# Allegro board AVRUSB500_2.brd
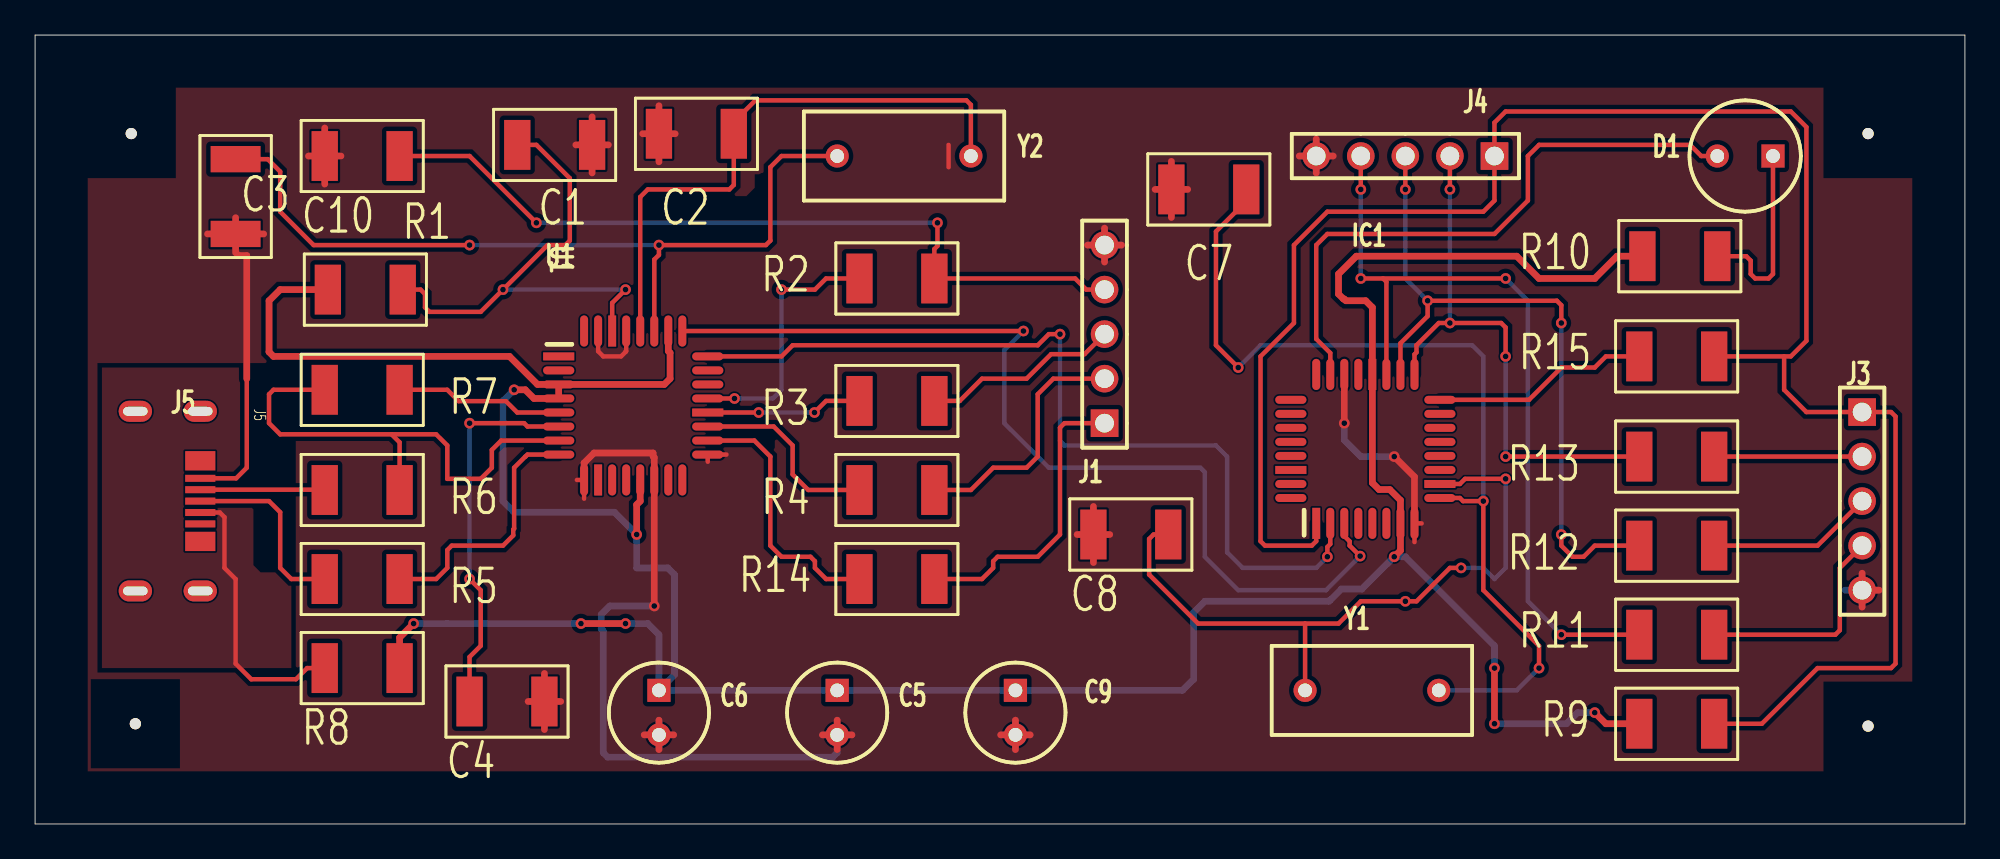
[diagram p0: board, top side]
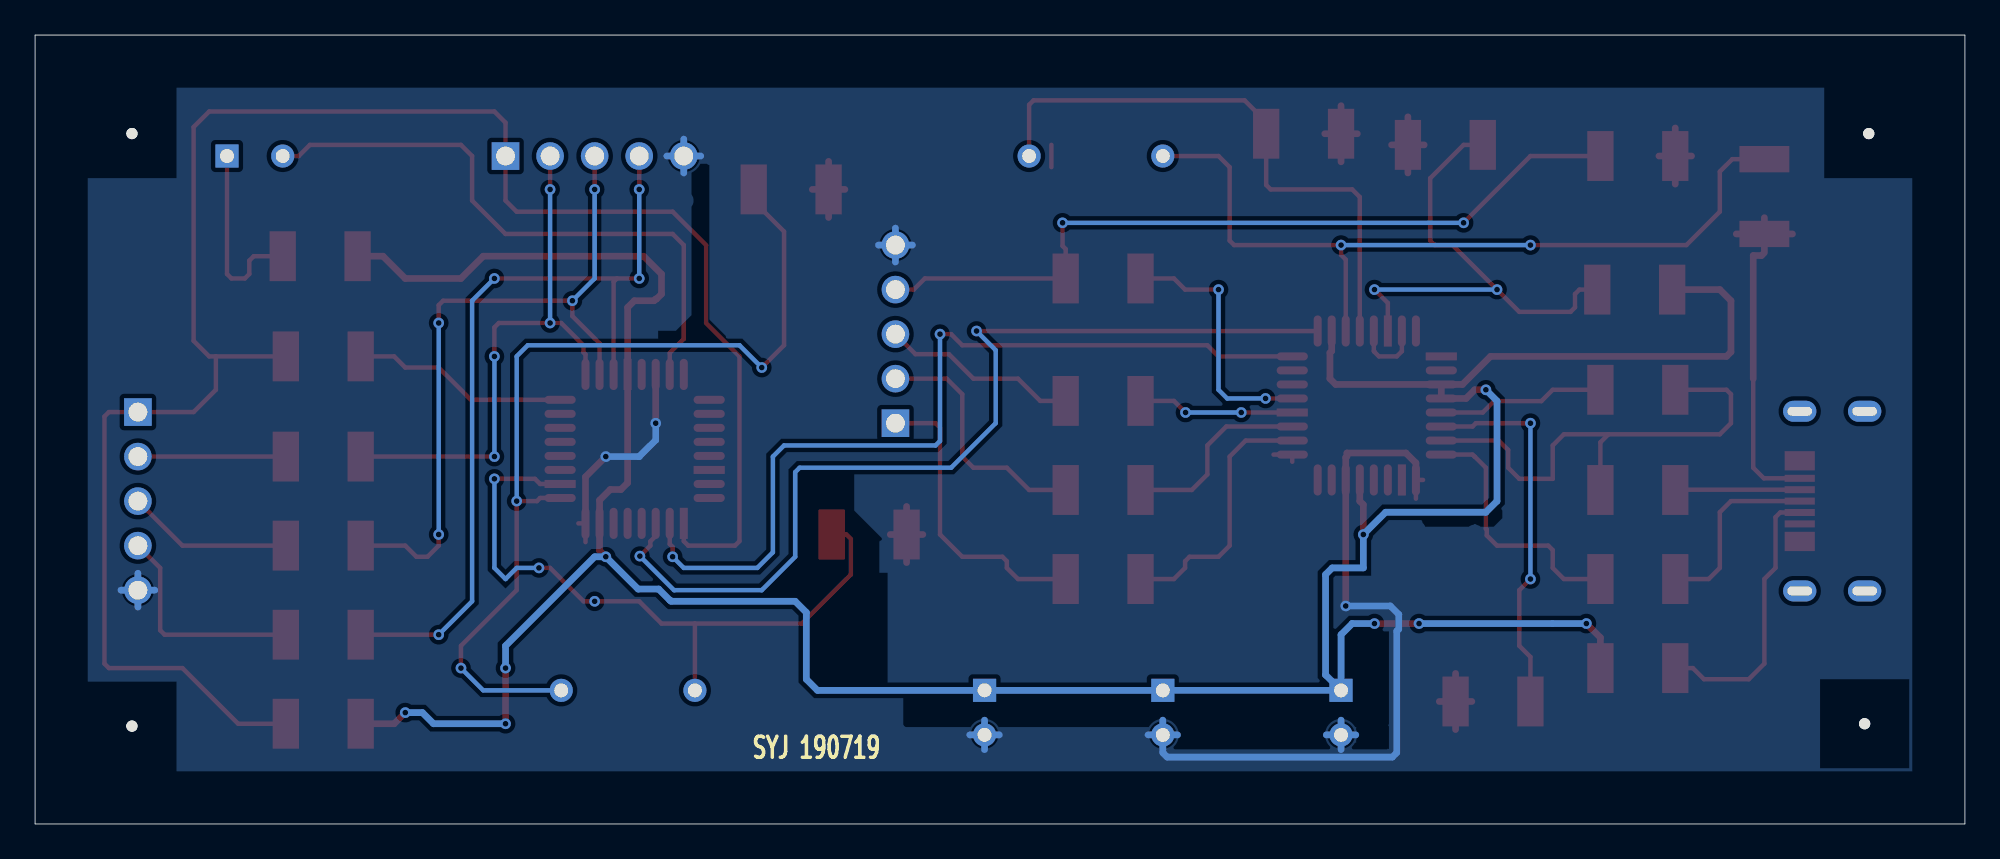
[diagram p1: board, bottom side, seen from below]

Outline 110 x 45 mm; copper layers: TOP, BOTTOM. Coordinates in mm from the lower left corner of the outline.
Outline path: 0,45 110,45 110,0 0,0 0,45

## Design rules (mm)
constraint set DEFAULT: min track width 0.254
net group POWERNETS: nets VCC

## Placement (name value [footprint] x y rotation side)
C1  47nF  [CPCYL1D225LS100031]  31.75 38.74 180 top
C2  27pF  [CPCYL1D225LS100031]  35.56 39.37 0 top
C3  27pF  [CPCYL1D225LS100031]  11.43 33.66 90 top
C4  47nF  [CPCYL1D225LS100031]  24.77 6.99 0 top
C5  100nF  [CPCYL1D225LS100031#2]  45.72 7.62 270 top
C6  1uF  [CPCYL1D225LS100031#2]  35.56 7.62 270 top
C7  100nF  [CPCYL1D225LS100031]  64.77 36.2 0 top
C8  100nF  [CPCYL1D225LS100031]  60.33 16.51 0 top
C9  100nF  [CPCYL1D225LS100031#2]  55.88 7.62 270 top
C10  22nF  [CPCYL1D225LS100031]  16.51 38.1 0 top
D1  LED  [CYLD250LS125031]  99.06 38.1 180 top
IC1  ATmega8  [QUAD80M32WG900]  73.03 17.15 0 top
J1  bbpg_Bitbang  [BLKCON100VHTM1SQSW1005]  60.96 22.86 90 top
J3  avrusb500_out  [BLKCON100VHTM1SQSW1005]  104.14 23.5 270 top
J4  firmware_in  [BLKCON100VHTM1SQSW1005]  83.19 38.1 180 top
J5  USBA  [MICRO_USB]  5.72 18.42 270 top
NOREF  -  [unnamed]  104.48 39.38 0 top
NOREF#2  -  [unnamed]  5.48 39.38 0 top
NOREF#3  -  [unnamed]  5.72 5.72 0 top
NOREF#4  -  [unnamed]  104.48 5.58 0 top
NOREF#5  -  [#2]  0 45 0 top
NOREF#6  -  [#2]  0 0 90 top
R1  470  [AX400X100031]  20.96 30.48 180 top
R2  220  [AX400X100031]  46.99 31.12 0 top
R3  220  [AX400X100031]  46.99 24.13 0 top
R4  220  [AX400X100031]  46.99 19.05 0 top
R5  27  [AX400X100031]  16.51 13.97 0 top
R6  27  [AX400X100031]  16.51 19.05 0 top
R7  1.5k  [AX400X100031]  16.51 24.77 0 top
R8  2.2  [AX400X100031]  16.51 8.89 0 top
R9  10k  [AX400X100031]  91.44 5.72 0 top
R10  470  [AX400X100031]  95.88 32.39 180 top
R11  1k  [AX400X100031]  91.44 10.8 0 top
R12  220  [AX400X100031]  91.44 15.88 0 top
R13  1k  [AX400X100031]  91.44 20.96 0 top
R14  220  [AX400X100031]  46.99 13.97 0 top
R15  220  [AX400X100031]  91.44 26.67 0 top
U1  FT232BM  [QUAD80M32WG900]  29.85 26.67 270 top
Y1  3.6864Mhz  [RAD450X200LS300031]  72.39 7.62 0 top
Y2  6Mhz  [RAD450X200LS300031]  53.34 38.1 180 top

## Library data of the parts
C1-C4 C7 C8 C10 = CAPACITOR NON-POL: alternate symbols: (SML2015)
C5 C9 = CAPACITOR NON-POL: alternate symbols: (SMDCAP)
C6 = CAPACITOR POL: alternate symbols: (SMDCAP)
D1 = LED
IC1 = ATmega8-DIL28_1
J1 J3 J4 = CON5
J5 = CON4_7
R1-R15 = R: alternate symbols: (SML2015)
U1 = FT232BM_2
Y1 Y2 = ZTA

## Footprints (pads in the part's own frame, mm; a bottom-side part is the same pattern mirrored in y, then rotated)
AX400X100031
  rect 1.499x2.845 smd: 1(0,0) 2(4.267,0)
BLKCON100VHTM1SQSW1005
  rect 1.575x1.575 hole 1.067: 1(0,0)
  round 1.575 hole 1.067: 2(2.54,0) 3(5.08,0) 4(7.62,0) 5(10.16,0)
CPCYL1D225LS100031
  rect 1.499x2.845 smd: 1(0,0) 2(4.267,0)
CPCYL1D225LS100031#2
  rect 1.321x1.321 hole 0.787: 1(0,0)
  round 1.321 hole 0.787: 2(2.54,0)
CYLD250LS125031
  rect 1.321x1.321 hole 0.787: 1(0,0)
  round 1.321 hole 0.787: 2(3.175,0)
MICRO_USB
  oval 1.2x1.9 hole 0.5x1.4: (-5.125,3.7) (-5.125,0) (5.125,3.7) (5.125,0)
  rect 1.1x1.72 smd: (-2.3,3.7) (2.3,3.7)
  rect 0.4x1.72 smd: 1(-1.3,3.7) 2(-0.65,3.7) 3(0,3.7) 4(0.65,3.7) 5(1.3,3.7)
QUAD80M32WG900
  rect 0.457x1.778 smd: 1(0,0) 20(3.2,8.496)
  oval 0.457x1.778 smd: 2(0.8,0) 3(1.6,0) 4(2.4,0) 5(3.2,0) 6(4,0) 7(4.801,0) 8(5.601,0) 17(5.601,8.496) 18(4.801,8.496) 19(4,8.496) 21(2.4,8.496) 22(1.6,8.496) 23(0.8,8.496) 24(0,8.496)
  oval 1.778x0.457 smd: 9(7.048,1.448) 11(7.048,3.048) 12(7.048,3.848) 13(7.048,4.648) 14(7.048,5.448) 15(7.048,6.248) 16(7.048,7.048) 25(-1.448,7.048) 26(-1.448,6.248) 27(-1.448,5.448) 28(-1.448,4.648) 29(-1.448,3.848) 31(-1.448,2.248) 32(-1.448,1.448)
  rect 1.778x0.457 smd: 10(7.048,2.248) 30(-1.448,3.048)
RAD450X200LS300031
  round 1.321 hole 0.787: 1(0,0) 2(7.62,0)
unnamed
  round 0.635 hole 3.175 unplated: (0,0)

## Nets
+5V: J5.4 R8.1
GND: C1.1 C2.1 C3.1 C4.2 C5.2 C6.2 C7.1 C8.1 C9.2 C10.1 IC1.8 IC1.22 J1.5 J3.5 J4.5 J5.1 U1.9 U1.14 U1.17 U1.29 U1.31
VCC: C5.1 C6.1 C9.1 IC1.7(VCC) IC1.20 R1.2 R8.2 R9.1 R10.2 U1.3 U1.4 U1.13 U1.26
BMISO: J1.3 R3.2
BMOSI: J1.2 R4.2
BRESET: J1.1 R14.2
BSCK: C10.2 J1.4 R2.2
D+: J5.2 R6.1
D-: J5.3 R5.1
F_MISO: IC1.18 J4.3 R12.1
F_MOSI: IC1.17 J4.2 R13.1
F_SCK: IC1.19 J4.4 R11.1
MISO: J3.3 R12.2
MOSI: J3.2 R13.2
RESET: IC1.1 J3.1 J4.1 R9.2 R15.2
RXD: IC1.2 U1.24
SCK: J3.4 R11.2
TXD: IC1.3 U1.25
N02483: R6.2 R7.1 U1.7
N02615: R5.2 U1.8
N03527: C4.1 U1.6
N06839: R2.1 U1.21
N06967: R3.1 U1.20
N07033: R4.1 U1.19
N07247: R14.1 U1.18
N11951: R7.2 U1.5
N15182: C7.2 IC1.9 Y1.2
N15289: C8.2 IC1.10 Y1.1
N19734: D1.2(CATHODE) IC1.23
N20572: D1.1 R10.1
N22544: IC1.16 R15.1
N41098: C3.2 U1.27 Y2.2
N41106: C2.2 U1.28(XTOUT) Y2.1
N49165: C1.2 R1.1 U1.30

Pads without a net: IC1 4 5 6 11 12 13 14 15 21 24 25 26 27 28 29 30 31 32; J5 5; U1 1 2 10 11 12 15 16 22 23 32

## Via types
v1: diameter 0.61, hole 0.33, TOP to BOTTOM, 46 vias

## Routing (per net, layer and track width the routed paths; a pad name or vN(x,y) marks a point on that pad's centre or on a via; arc(x,y) is an arc through that point)
+5V: length 15.8
  TOP w0.254: J5.4 10.53,17.77 10.8,17.5 10.8,14.61 11.43,13.97 11.43,9.14 12.32,8.26 14.87,8.26 15.51,8.89 R8.1
GND: length 153.3
  TOP w0.254: 31.29,18.56 U1.9 30.89,19.62 ; 38.34,20.66 U1.17 39.41,21.07 ; 79.03,17.15 IC1.8 78.63,16.08 ; 52.07,38.74 52.07,37.47 ; U1.29 33.69,26.98 33.66,26.94 33.66,26.92 33.4,26.67 32.38,26.67 32.09,26.96 U1.31 ; 12.06,25.4 12.06,20.32 11.46,19.72 J5.1
  TOP w0.381: J3.5 104.14,14.3 ; J3.5 105.11,13.34 ; J3.5 104.14,12.37 ; C7.1 64.77,37.8 ; C7.1 63.84,36.2 ; C7.1 64.77,34.59 ; C7.1 65.7,36.2 ; 73.03,37.13 J4.5 ; J4.5 73.99,38.1 ; J4.5 72.06,38.1 ; J4.5 73.03,39.07 ; C6.2 36.4,5.08 ; C6.2 34.72,5.08 ; C6.2 35.56,5.92 ; C6.2 35.56,4.24 ; 12.06,25.4 12.06,32.42 11.6,32.42 11.43,32.59 ; 44.88,5.08 C5.2 ; C5.2 46.56,5.08 ; C5.2 45.72,5.92 ; C5.2 45.72,4.24 ; C2.1 36.49,39.37 ; C2.1 35.56,37.77 ; C2.1 34.63,39.37 ; C2.1 35.56,40.97 ; 55.04,5.08 C9.2 ; C9.2 56.72,5.08 ; C9.2 55.88,5.92 ; C9.2 55.88,4.24 ; C8.1 61.25,16.51 ; C8.1 60.33,14.91 ; C8.1 59.4,16.51 ; C8.1 60.33,18.11 ; C1.1 31.75,40.34 ; C1.1 32.68,38.74 ; C1.1 31.75,37.13 ; C1.1 30.82,38.74 ; C3.1 13.03,33.66 ; C3.1 11.43,34.58 ; C3.1 11.43,32.73 ; C3.1 9.83,33.66 ; 16.51,36.5 C10.1 ; C10.1 16.51,39.7 ; C10.1 15.58,38.1 ; C10.1 17.44,38.1 ; J1.5 60.96,33.99 ; J1.5 61.93,33.02 ; J1.5 60.96,32.05 ; J1.5 59.99,33.02 ; 28.1,6.99 C4.2 ; C4.2 29.03,8.59 ; C4.2 29.96,6.99 ; C4.2 29.03,5.38
  TOP w0.382: v1(35.29,12.43) U1.14 35.29,20.9 35.22,20.97 35.22,21.16 31.86,21.16 31.29,20.59 U1.9 ; IC1.8 78.63,19.8 v1(77.47,20.96) ; v1(74.62,22.86) 74.62,25.64
  BOTTOM w0.381: 55.88,4.24 C9.2 ; C9.2 56.72,5.08 ; C9.2 55.04,5.08 ; C9.2 55.88,5.92 ; J1.5 60.96,33.99 ; J1.5 59.99,33.02 ; J1.5 61.93,33.02 ; J1.5 60.96,32.05 ; J4.5 73.03,39.07 ; J4.5 73.03,37.13 ; J4.5 73.99,38.1 ; J4.5 72.06,38.1 ; 104.14,12.37 J3.5 ; J3.5 103.17,13.34 ; J3.5 105.11,13.34 ; J3.5 104.14,14.3 ; C6.2 35.56,5.92 ; C6.2 35.56,4.24 ; C6.2 36.4,5.08 ; C6.2 34.72,5.08 ; C5.2 45.72,5.92 ; C5.2 46.56,5.08 ; C5.2 44.88,5.08
  BOTTOM w0.382: v1(35.29,12.43) 32.75,12.43 32.27,11.95 32.27,11.12 32.38,11 32.38,4.06 32.64,3.81 45.47,3.81 45.72,4.06 C5.2 ; v1(77.47,20.96) 75.56,20.96 74.62,21.9 v1(74.62,22.86)
VCC: length 192.2
  TOP w0.381: v1(88.9,6.35) 89.54,5.72 R9.1 ; v1(21.58,11.43) 20.78,10.63 R8.2 ; v1(83.19,8.89) v1(83.19,5.72) ; v1(31.12,11.43) v1(33.66,11.43)
  TOP w0.382: U1.3 35.87,25.07 36.19,25.4 36.19,26.87 36.09,26.98 U1.26 ; U1.3 U1.4 28.44,24.27 27.94,24.77 v1(27.31,24.77) ; U1.3 28.64,25.07 27.04,26.67 13.59,26.67 13.34,26.92 13.34,29.84 13.97,30.48 R1.2 ; v1(77.47,15.24) 77.83,15.6 IC1.7 77.83,18.47 77.22,19.08 76.61,19.08 76.23,19.46 IC1.20 76.23,29.46 75.84,29.84 74.72,29.84 74.62,29.94 74.58,29.94 74.3,30.23 74.3,31.37 75.31,32.39 84.46,32.39 85.73,31.12 88.9,31.12 90.17,32.39 R10.2 ; v1(34.29,16.51) 34.29,18.21 34.49,18.42 34.49,19.62
  BOTTOM w0.381: v1(21.58,11.43) 23.5,11.43 ; C5.1 C6.1 ; v1(33.66,11.43) 34.93,11.43 34.93,11.43
  BOTTOM w0.382: v1(83.19,8.89) 83.19,10.16 78.11,15.24 v1(77.47,15.24) 75.63,13.4 74.46,13.4 73.82,12.76 73.81,12.76 73.74,12.7 66.68,12.7 66.04,12.06 66.04,8.26 65.41,7.62 C9.1 C5.1 ; v1(83.19,5.72) 87.29,5.72 87.92,6.35 v1(88.9,6.35) ; 34.93,11.43 35.56,10.8 C6.1 36.45,8.51 36.45,14.22 36.06,14.61 34.29,14.61 v1(34.29,16.51) 33.02,17.78 27.31,17.78 26.67,18.42 26.67,24.13 v1(27.31,24.77) ; 23.5,11.43 v1(31.12,11.43)
BMISO: length 11.3
  TOP w0.254: J1.3 59.82,26.8 57.91,26.8 56.52,25.4 53.98,25.4 52.71,24.13 R3.2
BMOSI: length 14.4
  TOP w0.254: J1.2 58.04,25.4 57.15,24.51 57.15,20.96 56.52,20.32 54.61,20.32 53.34,19.05 R4.2
BRESET: length 17.2
  TOP w0.254: R14.2 53.98,13.97 54.61,14.61 54.61,14.99 54.86,15.24 57.15,15.24 58.42,16.51 58.42,22.61 58.67,22.86 J1.1
BSCK: length 45.5
  TOP w0.254: v1(28.58,34.29) 24.77,38.1 C10.2 ; v1(51.44,34.29) 51.44,32.97 51.26,32.79 R2.2 59.28,31.12 59.92,30.48 J1.4
  BOTTOM w0.254: v1(51.44,34.29) v1(28.58,34.29)
D+: length 7.1
  TOP w0.254: R6.1 16.5,19.07 J5.2
D-: length 10.8
  TOP w0.254: J5.3 13.34,18.42 13.97,17.78 13.97,14.61 14.61,13.97 R5.1
F_MISO: length 40
  TOP w0.254: v1(87,16.51) 87,15.88 87.63,15.24 88.27,15.24 88.9,15.88 R12.1 ; v1(87,28.58) 87,29.59 86.74,29.84 v1(79.38,29.84) 79.38,28.97 77.83,27.42 IC1.18 ; J4.3 v1(78.11,36.2)
  BOTTOM w0.254: v1(87,28.58) v1(87,16.51) ; v1(78.11,36.2) 78.11,31.12 v1(79.38,29.84)
F_MOSI: length 31.9
  TOP w0.254: v1(83.82,20.96) R13.1 ; v1(83.82,26.67) 83.82,28.32 83.57,28.58 v1(80.65,28.58) 80.01,28.58 78.74,27.31 78.74,26.9 78.63,26.78 IC1.17 ; J4.2 v1(80.65,36.2)
  BOTTOM w0.254: v1(80.65,36.2) v1(80.65,28.58) ; v1(83.82,26.67) v1(83.82,20.96)
F_SCK: length 46.9
  TOP w0.254: IC1.19 77.03,30.93 76.84,31.12 ; v1(87,10.8) R11.1 ; 76.84,31.12 v1(75.56,31.12) ; 76.84,31.12 v1(83.82,31.12) ; J4.4 v1(75.56,36.2)
  BOTTOM w0.254: v1(83.82,31.12) 85.09,29.84 85.09,12.7 v1(87,10.8) ; v1(75.56,31.12) v1(75.56,36.2)
MISO: length 9.5
  TOP w0.254: 104.14,18.42 101.6,15.88 R12.2
MOSI: length 8.4
  TOP w0.254: J3.2 R13.2
RESET: length 110
  TOP w0.254: R9.2 98.43,5.72 101.6,8.89 105.79,8.89 106.05,9.14 106.05,23.24 105.79,23.5 J3.1 100.97,23.5 99.69,24.77 99.69,26.67 ; 99.69,26.67 R15.2 ; 99.69,26.67 100.08,26.67 100.97,27.56 100.97,39.75 100.08,40.64 83.82,40.64 83.19,40.01 J4.1 83.19,35.56 82.55,34.93 73.66,34.93 71.75,33.02 71.75,28.58 69.85,26.67 69.85,16.13 70.1,15.88 72.77,15.88 73.03,16.13 IC1.1
RXD: length 50.4
  TOP w0.254: v1(58.42,27.94) 57.79,27.94 57.15,27.31 43.18,27.31 42.55,26.67 U1.24 ; v1(73.66,15.24) 73.66,15.8 73.83,15.96 IC1.2
  BOTTOM w0.254: v1(58.42,27.94) 58.42,21.84 58.67,21.59 67.31,21.59 67.94,20.96 67.94,15.49 68.83,14.61 73.03,14.61 v1(73.66,15.24)
SCK: length 12.6
  TOP w0.254: R11.2 102.62,10.8 102.87,11.05 102.87,14.61 J3.4
TXD: length 55.3
  TOP w0.254: v1(75.53,15.28) 74.93,15.88 74.93,16.12 74.62,16.42 74.62,17.15 ; U1.25 v1(56.34,28.12)
  BOTTOM w0.254: v1(75.53,15.28) 73.58,13.34 68.58,13.34 66.68,15.24 66.68,20.07 66.42,20.32 57.79,20.32 55.25,22.86 55.25,27.03 v1(56.34,28.12)
N02483: length 28.7
  TOP w0.254: 29.85,21.87 26.57,21.87 26.04,21.34 26.04,20.32 25.4,19.69 23.5,19.69 23.5,21.59 22.86,22.23 20.32,22.23 ; R6.2 20.78,21.77 20.32,22.23 ; 20.32,22.23 13.97,22.23 13.34,22.86 13.34,24.51 13.59,24.77 R7.1
N02615: length 14.8
  TOP w0.254: U1.8 28.07,21.07 27.95,20.96 27.94,20.96 27.31,20.32 27.31,16.85 27.25,16.79 27.25,16.46 26.67,15.88 23.75,15.88 23.5,15.62 23.5,14.61 22.86,13.97 R5.2
N03527: length 22.2
  TOP w0.254: v1(24.77,13.97) 25.4,13.34 25.4,10.16 24.77,9.53 C4.1 24.77,6.35 ; U1.6 28.07,22.67 27.88,22.86 v1(24.77,22.86)
  BOTTOM w0.254: v1(24.77,13.97) v1(24.77,22.86)
N06839: length 14.8
  TOP w0.254: U1.21 v1(39.87,24.27) ; v1(42.55,30.48) 44.45,30.48 45.09,31.12 R2.1
  BOTTOM w0.254: v1(42.55,30.48) 42.55,24.77 42.05,24.27 v1(39.87,24.27)
N06967: length 8.9
  TOP w0.254: R3.1 45.09,24.13 v1(44.43,23.47) ; U1.20 v1(41.25,23.47)
  BOTTOM w0.254: v1(41.25,23.47) v1(44.43,23.47)
N07033: length 11.1
  TOP w0.254: U1.19 42.1,22.67 43.18,21.59 43.18,19.94 44.07,19.05 R4.1
N07247: length 15.1
  TOP w0.254: 38.34,21.87 41,21.87 41.91,20.96 41.91,15.88 42.55,15.24 44.2,15.24 44.45,14.99 44.45,14.61 45.09,13.97 R14.1
N11951: length 9.6
  TOP w0.254: U1.5 27.48,23.47 26.83,24.12 24.14,24.12 23.5,24.77 R7.2
N15182: length 54
  TOP w0.254: C7.2 69.04,35.52 67.31,33.79 67.31,27.31 v1(68.58,26.04) ; IC1.9 81.22,18.59 81.39,18.42 v1(82.55,18.42) 82.55,13.34 85.73,10.16 v1(85.73,8.89)
  BOTTOM w0.254: v1(82.55,18.42) 82.55,26.67 81.92,27.31 69.85,27.31 v1(68.58,26.04) ; v1(85.73,8.89) 84.46,7.62 Y1.2
N15289: length 39.3
  TOP w0.254: IC1.10 81.22,19.39 81.51,19.69 v1(83.82,19.69) ; 72.39,11.43 74.3,11.43 75.56,12.7 v1(78.11,12.7) 78.74,12.7 80.65,14.61 v1(81.28,14.61) ; 72.39,11.43 Y1.1 ; 72.39,11.43 66.29,11.43 63.5,14.22 63.5,16.26 63.75,16.51 C8.2
  BOTTOM w0.254: v1(81.28,14.61) 82.55,14.61 83.19,13.97 83.82,14.61 v1(83.82,19.69)
N19734: length 34.7
  TOP w0.254: IC1.23 73.83,26.87 73.03,27.67 73.03,33.02 73.66,33.66 83.19,33.66 85.09,35.56 85.09,38.1 85.73,38.74 94.34,38.74 94.97,38.1 D1.2
N20572: length 11
  TOP w0.254: D1.1 99.06,31.37 98.81,31.12 98.04,31.12 97.79,31.37 97.79,32.13 97.54,32.39 R10.1
N22544: length 12.4
  TOP w0.254: IC1.16 85.15,24.19 87,26.04 88.9,26.04 89.54,26.67 R15.1
N41098: length 47.2
  TOP w0.254: U1.27 35.29,32.19 35.56,32.46 v1(35.56,33.02) 41.66,33.02 41.91,33.27 41.91,37.47 42.55,38.1 Y2.2 ; v1(24.77,33.02) 15.88,33.02 13.97,34.93 13.97,37.21 13.26,37.92 C3.2
  BOTTOM w0.254: v1(24.77,33.02) v1(35.56,33.02)
N41106: length 33.9
  TOP w0.254: 34.49,28.12 34.49,35.76 34.93,36.2 39.57,36.2 39.83,36.45 C2.2 39.83,40.04 41.06,41.28 53.09,41.28 53.34,41.02 Y2.1
N49165: length 29.2
  TOP w0.254: C1.2 28.58,38.74 30.48,36.83 30.48,33.27 30.23,33.02 29.21,33.02 v1(26.67,30.48) 25.4,29.21 22.48,29.21 22.23,29.46 22.23,30.23 21.97,30.48 R1.1 ; U1.30 32.89,29.72 v1(33.66,30.48)
  BOTTOM w0.254: v1(26.67,30.48) v1(33.66,30.48)

## Copper pours and planes (outline as drawn; the poured copper is in the pictures)
+5V on TOP: 3.81,26.04 3.81,8.89 14.61,8.89 14.61,26.04 ; 3 cut-outs
GND on TOP: 3,3 3,42 107,42 107,3 ; 8 cut-outs
GND on BOTTOM: 3,3 3,42 107,42 107,3 ; 4 cut-outs

## Text on the board
Ref Des/Silkscreen Bottom: SYJ 190719
NCLEGEND-1-2: FIGURE | FINISHED_SIZE | 0.33 | 0.7869 | 1.0671 | 1.4x0.5001 | DRILL CHART: TOP to BOTTOM | ALL UNITS ARE IN MILLIMETERS | PLATED | QTY | 46 | 12 | 15 | 4
